# EAGLE board sr99-revA (EAGLE 9.6.2), part 1 of 6
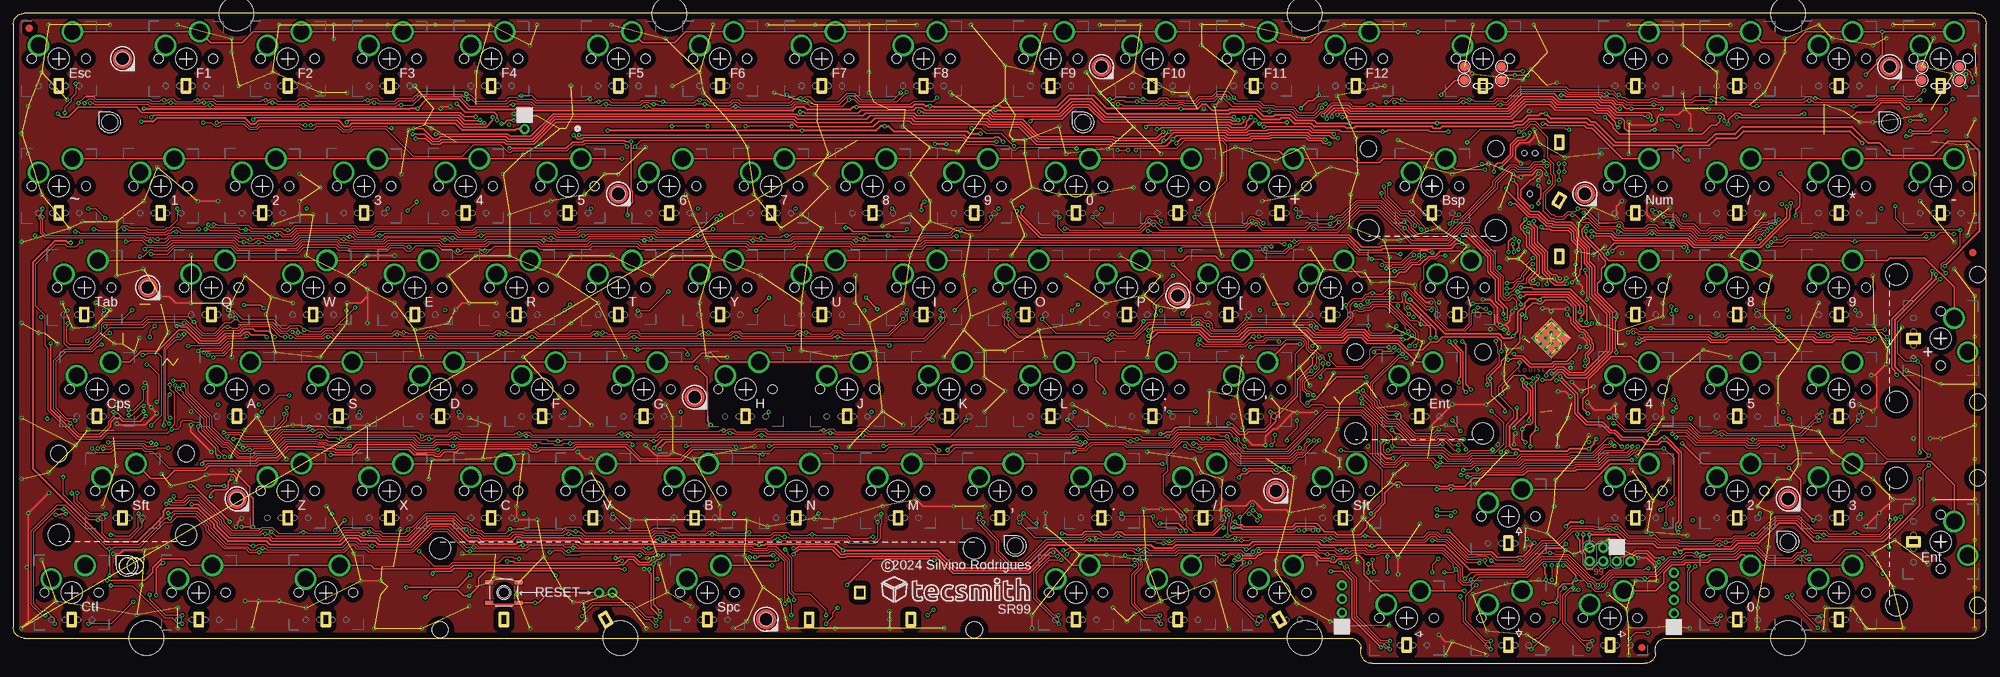
[diagram p0: board, top side]
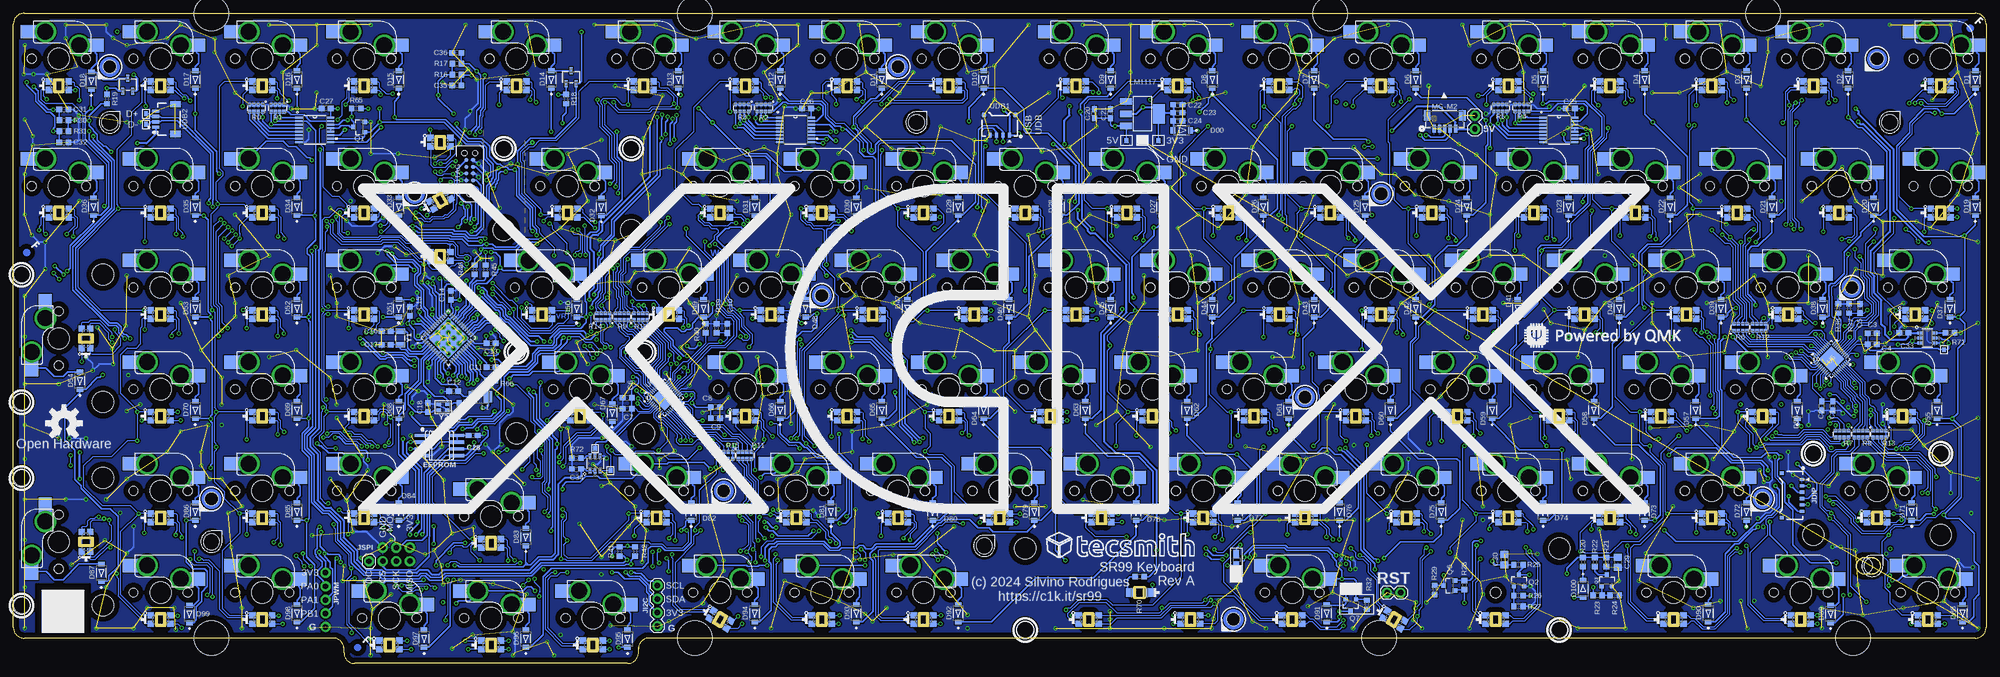
[diagram p1: board, bottom side, seen from below]

Size 369.48 x 121.83 mm. Coordinates in mm from the lower left corner, seen from the top.
Outline: 252.41,2.76 252.41,2 arc90 254.41,0 305.56,0 arc90 307.56,2 307.56,2.76
Outline: 252.41,2.76 252.41,3
Outline: 307.56,2.76 307.56,3
Outline: 307.56,2.76 arc-90 309.56,4.76 367.48,4.76 arc90 369.48,6.76 369.48,119.83 arc90 367.48,121.83 2,121.83 arc90 0,119.83 0,6.76 arc90 2,4.76 250.41,4.76 arc-90 252.41,2.76
Outline: 22.81,16.79 21.31,16.79 arc-180 21.31,19.79 22.81,19.79 arc-180 22.81,16.79
Copper layers (1*16): Top 0.035mm / dielectric 1.5mm / Bottom 0.035mm
Design rules "default *": minimum track width 6mil, minimum drill 0.35mm, track to track 9.5mil, track to pad 9.5mil, pad to pad 9.5mil, via to via 9.5mil, smd to smd 9.5mil, copper to edge 40mil, drill to drill 4mil, minimum pad ring 10mil, minimum via ring 8mil, stop-mask expansion 4mil, vias tented up to drill 0mil, thermal gap 9.5mil
Holes 6.5 mm at 332.38,121.8 241.89,121.8 122.83,121.8 41.83,121.8 332.38,4.79 241.89,4.79 113.72,4.79 24.97,4.79
Holes 2 mm at 91.87,13.29
Holes 3 mm at 22.81,18.29

## Footprints (pad centres in the part's own frame; a part is rotated, then mirrored left to right if it is on the bottom)
1X02 = drill 1.016 pad 1.88: 1 0,0; 2 2.54,0
C0603 = smd 1.1 x 1: 1 -0.85,0; 2 0.85,0
0603 = smd 1.1 x 1: 1 -0.85,0; 2 0.85,0
C0805 = smd 1.3 x 1.5: 1 -0.95,0; 2 0.95,0
SOD-123 = smd 0.914 x 1.219: A 1.638,0; C -1.638,0
LED-RM-MILL = smd 1.5 x 1.6: A 1.8,0; C -1.8,0
8-SOIC-SO8_N_W_DUAL = smd 0.6 x 2.731: 1 -1.905,-3.29; 2 -0.635,-3.29; 3 0.635,-3.29; 4 1.905,-3.29; 5 1.905,3.29; 6 0.635,3.29; 7 -0.635,3.29; 8 -1.905,3.29
MGEEK-M2-HOLE = hole 3: 0,0
BRUTAL-1800-HOLE = hole 2.5: 0,0
MX-STABS-200U = hole 3.988: -11.938,8.255; 11.938,8.255 | hole 3.048: -11.938,-6.985; 11.938,-6.985
MX-STABS-625U = hole 3.988: -50,8.255; 50,8.255 | hole 3.048: -50,-6.985; 50,-6.985
MOLEX_781710006 = smd 0.6 x 0.85: 1 -3,2; 2 -1.8,2; 3 -0.6,2; 4 0.6,2; 5 1.8,2; 6 3,2 | smd 0.7 x 0.8: NC1 -4.15,-1.775; NC2 4.15,-1.775
1X04 = drill 1.016 pad 1.88: 1 0,0; 2 2.54,0; 3 5.08,0; 4 7.62,0
1X05_NO_SILK = drill 1.016 pad 1.88: 1 0,0; 2 2.54,0; 3 5.08,0; 4 7.62,0; 5 10.16,0
2X3-NS = drill 1.016 pad 1.88: 1 -2.54,-1.27; 2 -2.54,1.27; 3 0,-1.27; 4 0,1.27; 5 2.54,-1.27; 6 2.54,1.27
1X01 = drill 1.016 pad 1.88: 1 0,0
TC2050-IDC-NL = smd 0.787 x 0.787: 1 1.27,-0.635; 2 2.54,-0.635; 3 3.81,-0.635; 4 5.08,-0.635; 5 6.35,-0.635; 6 6.35,0.635; 7 5.08,0.635; 8 3.81,0.635; 9 2.54,0.635; 10 1.27,0.635 | hole 1: 0,0; 7.62,-1.016; 7.62,1.016
L3225M = smd 1.6 x 2.2: 1 -1.4,0; 2 1.4,0
SOT223 = smd 1.219 x 2.235: 1 -2.311,-3.099; 2 0,-3.099; 3 2.311,-3.099 | smd 3.6 x 2.2: 4 0,3.099
CONN5_SM05B-SRSS_JST = smd 0.66 x 1.549: 1 -2,-1.772; 2 -1,-1.772; 3 0,-1.772; 4 1,-1.772; 5 2,-1.772 | smd 1.295 x 1.905: 6 -3.3,0.698; 7 3.3,0.698
SOT23-3 = smd 0.8 x 0.9: 1 -0.95,-1; 2 0.95,-1; 3 0,1.1
SOT-23-3L_AOS = smd 0.559 x 1.321: 1 -0.953,-1.194; 2 0.953,-1.194; 3 0,1.194
R0603X4 = smd 0.7 x 0.6: 1 -0.65,1.2; 2 -0.65,0.4; 3 -0.65,-0.4; 4 -0.65,-1.2; 5 0.65,-1.2; 6 0.65,-0.4; 7 0.65,0.4; 8 0.65,1.2
R0603 = smd 1 x 1.1: 1 -0.85,0; 2 0.85,0
R0805W = smd 1.5 x 1: 1 -1.052,0; 2 1.052,0
TACTILE_SWITCH_SMD_5.2MM = smd 1.524 x 0.762: 1 -2.794,1.905; 2 2.794,1.905; 3 -2.794,-1.905; 4 2.794,-1.905
MX-5-PIN-HOTSWAP-PAD = smd 3.15 x 2.5 bottom: 1@1 -6.785,2.54; 2@1 5.542,5.08 | drill 3 pad 3.75: 1@2 -3.81,2.54; 2@2 2.54,5.08 | hole 3.988: 0,0 | hole 1.7: -5.08,0; 5.08,0
MX-5-PIN-SKYLOONG-KNOB = smd 3.15 x 2.5 bottom: 1@1 -6.785,2.54; 2@1 5.542,5.08 | drill 3 pad 3.75: 1@2 -3.81,2.54; 2@2 2.54,5.08 | smd 1.75 x 1.75: A 3.5,-4; B 3.5,-1.5; C -3.5,-1.5; S -3.5,-4 | hole 3.988: 0,0 | hole 1.7: -5.08,0; 5.08,0
PAD.03X.03-SQ = smd 0.762 x 0.762: 1 0,0
UFQFPN-48_7X7X0P55MM-THERM = smd 0.813 x 0.305: 1 -3.454,2.75; 2 -3.454,2.25; 3 -3.454,1.75; 4 -3.454,1.25; 5 -3.454,0.75; 6 -3.454,0.25; 7 -3.454,-0.25; 8 -3.454,-0.75; 9 -3.454,-1.25; 10 -3.454,-1.75; 11 -3.454,-2.25; 12 -3.454,-2.75; 25 3.454,-2.75; 26 3.454,-2.25; 27 3.454,-1.75; 28 3.454,-1.25; 29 3.454,-0.75; 30 3.454,-0.25; 31 3.454,0.25; 32 3.454,0.75; 33 3.454,1.25; 34 3.454,1.75; 35 3.454,2.25; 36 3.454,2.75 | smd 0.305 x 0.813: 13 -2.75,-3.454; 14 -2.25,-3.454; 15 -1.75,-3.454; 16 -1.25,-3.454; 17 -0.75,-3.454; 18 -0.25,-3.454; 19 0.25,-3.454; 20 0.75,-3.454; 21 1.25,-3.454; 22 1.75,-3.454; 23 2.25,-3.454; 24 2.75,-3.454; 37 2.75,3.454; 38 2.25,3.454; 39 1.75,3.454; 40 1.25,3.454; 41 0.75,3.454; 42 0.25,3.454; 43 -0.25,3.454; 44 -0.75,3.454; 45 -1.25,3.454; 46 -1.75,3.454; 47 -2.25,3.454; 48 -2.75,3.454 | smd 5 x 5.4: 49 0.2,0 | smd 0.4 x 5: 49@1 -2.5,-0.2 | smd 0.56 x 0.29 rotated 45: 49@2 -2.4,2.4 | smd 5.4 x 5.4 bottom: 49@3 0,0 | drill 0.4: 49@4 -0.711,2.134; 49@5 0.711,2.134; 49@6 2.134,2.134; 49@7 -2.134,0.711; 49@8 -0.711,0.711; 49@9 0.711,0.711; 49@10 2.134,0.711; 49@11 -2.134,-0.711; 49@12 -0.711,-0.711; 49@13 0.711,-0.711; 49@14 2.134,-0.711; 49@15 -2.134,-2.134; 49@16 -0.711,-2.134; 49@17 0.711,-2.134; 49@18 2.134,-2.134
TSSOP16 = smd 1.408 x 0.356: 1 -2.952,2.275; 2 -2.952,1.625; 3 -2.952,0.975; 4 -2.952,0.325; 5 -2.952,-0.325; 6 -2.952,-0.975; 7 -2.952,-1.625; 8 -2.952,-2.275; 9 2.952,-2.275; 10 2.952,-1.625; 11 2.952,-0.975; 12 2.952,-0.325; 13 2.952,0.325; 14 2.952,0.975; 15 2.952,1.625; 16 2.952,2.275
UQFN40 = smd 0.813 x 0.203: 1 -2.4,1.8; 2 -2.4,1.4; 3 -2.4,1; 4 -2.4,0.6; 5 -2.4,0.2; 6 -2.4,-0.2; 7 -2.4,-0.6; 8 -2.4,-1; 9 -2.4,-1.4; 10 -2.4,-1.8; 21 2.4,-1.8; 22 2.4,-1.4; 23 2.4,-1; 24 2.4,-0.6; 25 2.4,-0.2; 26 2.4,0.2; 27 2.4,0.6; 28 2.4,1; 29 2.4,1.4; 30 2.4,1.8 | smd 0.203 x 0.813: 11 -1.8,-2.4; 12 -1.4,-2.4; 13 -1,-2.4; 14 -0.6,-2.4; 15 -0.2,-2.4; 16 0.2,-2.4; 17 0.6,-2.4; 18 1,-2.4; 19 1.4,-2.4; 20 1.8,-2.4; 31 1.8,2.4; 32 1.4,2.4; 33 1,2.4; 34 0.6,2.4; 35 0.2,2.4; 36 -0.2,2.4; 37 -0.6,2.4; 38 -1,2.4; 39 -1.4,2.4; 40 -1.8,2.4 | smd 3 x 3.4: EPAD 0.225,0 | smd 0.566 x 0.566 rotated 315: EPAD@1 -1.278,1.299 | smd 0.4 x 3: EPAD@2 -1.477,-0.2
SOT-23-THIN-6_DDC_TEX = smd 1.003 x 0.559: 1 -1.378,0.95; 2 -1.378,0; 3 -1.378,-0.95; 4 1.378,-0.95; 5 1.378,0; 6 1.378,0.95
MOLEX_781710004 = smd 0.6 x 0.85: 1 -1.8,2; 2 -0.6,2; 3 0.6,2; 4 1.8,2 | smd 0.7 x 0.8: NC1 -2.95,-1.775; NC2 2.95,-1.775
JST_SM04B-SRSS-TB_LF_SN = smd 0.6 x 1.35: 1 -1.5,0; 2 -0.5,0; 3 0.5,0; 4 1.5,0 | smd 1.2 x 2: NC1 2.8,-3.675; NC2 -2.8,-3.675
CRYSTAL-SMD-3.2X1.5MM = smd 1 x 1.8: P$1 -1.25,0; P$2 1.25,0
CRYSTAL_2.5X2 = smd 0.9 x 0.75: 1 -0.825,-0.625; 2 0.825,-0.625; 3 0.825,0.625; 4 -0.825,0.625
156120M173000-MILL = smd 1.2 x 1.2: 1 -1.85,0.8; 2 -1.85,-0.8; 3 1.85,-0.8; 4 1.85,0.8

## Placement (x,y rotation side)
5V  [1X02]  95.75,100.15 90 bottom
C1  1uF  [C0603]  28.73,48.25 90 bottom
C2  0.1uF  [C0603]  30.77,48.25 90 bottom
C3  1uF  [C0603]  21.3,61.9 180 bottom
C4  0.1uF  [C0603]  21.3,59.83 180 bottom
C5  0.1uF  [C0603]  23.65,66.53 270 bottom
C6  1uF  [C0603]  254.5,49.8 0 bottom
C7  0.1uF  [C0603]  254.5,47.77 0 bottom
C8  1uF  [C0603]  238,48 180 bottom
C9  0.1uF  [C0603]  238,45.98 180 bottom
C10  0.1uF  [C0603]  235.78,62.8 270 bottom
C11  22uF  [C0603]  280,55.5 0 bottom
C12  100nF  [C0603]  287,51 180 bottom
C13  100nF  [C0603]  280,60 0 bottom
C14  100nF  [C0603]  287.5,69 90 bottom
C15  100nF  [C0603]  295.23,66 90 bottom
C16  4.3pF  [C0603]  299.65,62.25 180 bottom
C17  4.3pF  [C0603]  299.65,59.75 180 bottom
C18  12pF  [C0603]  291.85,48 90 bottom
C19  12pF  [C0603]  286,48 270 bottom
C20  22uF  [0603]  167,103 90 bottom
C21  100nF  [0603]  164,103 90 bottom
C22  100nF  [0603]  151.4,104.7 0 bottom
C23  22uF  [0603]  151.4,103.2 0 bottom
C24  4.7uF  [0603]  151.4,101.7 0 bottom
C25  100nF  [0603]  77.9,104 180 bottom
C26  100nF  [0603]  220.9,104 180 bottom
C27  100nF  [0603]  310.9,104 180 bottom
C28  100nF  [0603]  283.35,42.75 0 bottom
C29  10uF  [C0805]  68.95,18.95 270 bottom
C30  100nF  [C0805]  90.2,19.48 270 bottom
C31  100nF  [C0603]  360,103.8 0 bottom
C32  100nF  [C0603]  360,97.67 0 bottom
C33  1uF  [C0603]  15.42,61.95 0 bottom
C34  1uF  [C0603]  264.02,36.45 0 bottom
C35  100nF  [C0603]  286.43,108.3 180 bottom
C36  100nF  [C0603]  286.43,114.42 180 bottom
D00  B5819W SL  [SOD-123]  150.65,99.9 180 bottom
D1  [SOD-123]  2.03,109.43 90 bottom
D2  [SOD-123]  25.84,109.43 90 bottom
D3  [SOD-123]  44.89,109.43 90 bottom
D4  [SOD-123]  63.94,109.43 90 bottom
D5  [SOD-123]  82.99,109.43 90 bottom
D6  [SOD-123]  106.81,109.43 90 bottom
D7  [SOD-123]  125.86,109.43 90 bottom
D8  [SOD-123]  144.91,109.43 90 bottom
D9  [SOD-123]  163.96,109.43 90 bottom
D10  [SOD-123]  187.77,109.43 90 bottom
D11  [SOD-123]  206.82,109.43 90 bottom
D12  [SOD-123]  225.87,109.43 90 bottom
D13  [SOD-123]  244.92,109.43 90 bottom
D14  [SOD-123]  268.73,109.43 90 bottom
D15  [SOD-123]  297.31,109.43 90 bottom
D16  [SOD-123]  316.36,109.43 90 bottom
D17  [SOD-123]  335.41,109.43 90 bottom
D18  [SOD-123]  354.88,109.2 90 bottom
D19  [SOD-123]  2.03,85.61 90 bottom
D20  [SOD-123]  21.08,85.61 90 bottom
D21  [SOD-123]  40.13,85.61 90 bottom
D22  [SOD-123]  59.18,85.61 90 bottom
D23  [SOD-123]  78.23,85.61 90 bottom
D24  [SOD-123]  97.28,85.61 90 bottom
D25  [SOD-123]  116.33,85.61 90 bottom
D26  [SOD-123]  135.38,85.61 90 bottom
D27  [SOD-123]  154.43,85.61 90 bottom
D28  [SOD-123]  173.48,85.61 90 bottom
D29  [SOD-123]  192.53,85.61 90 bottom
D30  [SOD-123]  211.58,85.61 90 bottom
D31  [SOD-123]  230.63,85.61 90 bottom
D32  [SOD-123]  259.36,85.54 90 bottom
D33  [SOD-123]  297.31,85.61 90 bottom
D34  [SOD-123]  316.36,85.61 90 bottom
D35  [SOD-123]  335.41,85.61 90 bottom
D36  [SOD-123]  354.46,85.61 90 bottom
D37  [SOD-123]  6.79,66.56 90 bottom
D38  [SOD-123]  30.61,66.56 90 bottom
D39  [SOD-123]  49.66,66.56 90 bottom
D40  [SOD-123]  68.71,66.56 90 bottom
D41  [SOD-123]  87.76,66.56 90 bottom
D42  [SOD-123]  106.81,66.56 90 bottom
D43  [SOD-123]  125.86,66.56 90 bottom
D44  [SOD-123]  144.91,66.56 90 bottom
D45  [SOD-123]  163.96,66.56 90 bottom
D46  [SOD-123]  183.01,66.56 90 bottom
D47  [SOD-123]  202.06,66.56 90 bottom
D48  [SOD-123]  221.11,66.56 90 bottom
D49  [SOD-123]  240.21,66.56 90 bottom
D50  [SOD-123]  263.97,66.56 90 bottom
D51  [SOD-123]  297.31,66.56 90 bottom
D52  [SOD-123]  316.36,66.56 90 bottom
D53  [SOD-123]  335.41,66.56 90 bottom
D54  [SOD-123]  357,53 90 bottom
D55  [SOD-123]  9.18,47.52 90 bottom
D56  [SOD-123]  35.37,47.52 90 bottom
D57  [SOD-123]  54.42,47.52 90 bottom
D58  [SOD-123]  73.47,47.52 90 bottom
D59  [SOD-123]  92.52,47.52 90 bottom
D60  [SOD-123]  111.57,47.52 90 bottom
D61  [SOD-123]  130.62,47.52 90 bottom
D62  [SOD-123]  149.67,47.52 90 bottom
D63  [SOD-123]  168.72,47.52 90 bottom
D64  [SOD-123]  187.77,47.52 90 bottom
D65  [SOD-123]  206.82,47.52 90 bottom
D66  [SOD-123]  225.87,47.52 90 bottom
D67  [SOD-123]  257.32,47.02 90 bottom
D68  [SOD-123]  297.31,47.52 90 bottom
D69  [SOD-123]  316.36,47.52 90 bottom
D70  [SOD-123]  335.41,47.52 90 bottom
D71  [SOD-123]  13.94,28.46 90 bottom
D72  [SOD-123]  44.89,28.46 90 bottom
D73  [SOD-123]  63.94,28.46 90 bottom
D74  [SOD-123]  82.99,28.46 90 bottom
D75  [SOD-123]  102.04,28.46 90 bottom
D76  [SOD-123]  121.09,28.46 90 bottom
D77  [SOD-123]  140.14,28.46 90 bottom
D78  [SOD-123]  159.19,28.46 90 bottom
D79  [SOD-123]  178.24,28.46 90 bottom
D80  [SOD-123]  197.29,28.46 90 bottom
D81  [SOD-123]  216.34,28.46 90 bottom
D82  [SOD-123]  242.54,28.46 90 bottom
D83  [SOD-123]  273.49,23.7 90 bottom
D84  [SOD-123]  297.31,28.46 90 bottom
D85  [SOD-123]  316.36,28.46 90 bottom
D86  [SOD-123]  335.41,28.46 90 bottom
D87  [SOD-123]  353,17 90 bottom
D88  [SOD-123]  4.41,9.41 90 bottom
D89  [SOD-123]  29.12,9.29 90 bottom
D90  [SOD-123]  52.04,9.41 90 bottom
D91  [SOD-123]  123.47,9.41 90 bottom
D92  [SOD-123]  192.53,9.41 90 bottom
D93  [SOD-123]  211.58,9.41 90 bottom
D94  [SOD-123]  230.63,9.41 90 bottom
D95  [SOD-123]  254.44,4.65 90 bottom
D96  [SOD-123]  273.49,4.65 90 bottom
D97  [SOD-123]  292.54,4.65 90 bottom
D98  [SOD-123]  316.36,9.41 90 bottom
D99  [SOD-123]  336.51,9.29 90 bottom
D100  1N4148  [SOD-123]  75.5,14 270 bottom
D107  BLUE  [LED-RM-MILL]  158.54,13.29 180 bottom
EEPROM  M25CDUAL  [8-SOIC-SO8_N_W_DUAL]  289.69,40.85 270 bottom
G1  MGEEK-M2-HOLE  [MGEEK-M2-HOLE]  18.05,101.39 0 top
G2  MGEEK-M2-HOLE  [MGEEK-M2-HOLE]  200.34,101.39 0 top
G3  MGEEK-M2-HOLE  [MGEEK-M2-HOLE]  351.43,101.39 0 top
G4  MGEEK-M2-HOLE  [MGEEK-M2-HOLE]  332.38,22.81 0 top
G5  MGEEK-M2-HOLE  [MGEEK-M2-HOLE]  187.65,22.05 0 top
G6  MGEEK-M2-HOLE  [MGEEK-M2-HOLE]  21.31,18.29 0 top
H1  BRURAL-1800-HOLE  [BRUTAL-1800-HOLE]  351.43,111.8 0 top
H2  BRURAL-1800-HOLE  [BRUTAL-1800-HOLE]  203.79,111.8 0 top
H3  BRURAL-1800-HOLE  [BRUTAL-1800-HOLE]  20.43,113.3 0 top
H4  BRURAL-1800-HOLE  [BRUTAL-1800-HOLE]  294.3,87.99 0 top
H5  BRURAL-1800-HOLE  [BRUTAL-1800-HOLE]  113.3,87.99 0 top
H6  BRURAL-1800-HOLE  [BRUTAL-1800-HOLE]  218.07,68.94 0 top
H7  BRURAL-1800-HOLE  [BRUTAL-1800-HOLE]  25.19,70.44 0 top
H8  BRURAL-1800-HOLE  [BRUTAL-1800-HOLE]  127.59,49.89 0 top
H9  BRURAL-1800-HOLE  [BRUTAL-1800-HOLE]  332.38,30.84 0 top
H10  BRURAL-1800-HOLE  [BRUTAL-1800-HOLE]  236.43,32.34 0 top
H11  BRURAL-1800-HOLE  [BRUTAL-1800-HOLE]  140.97,8.29 0 top
H12  BRURAL-1800-HOLE  [BRUTAL-1800-HOLE]  41.89,30.84 0 top
H_BSP  MX-STABS-200U  [MX-STABS-200U]  265.7,89.49 180 top
H_ENT  MX-STABS-200U  [MX-STABS-200U]  263.32,51.39 180 top
H_LS  MX-STABS-200U  [MX-STABS-200U]  20.43,32.34 180 top
H_NEN  MX-STABS-200U  [MX-STABS-200U]  360.95,22.81 90 top
H_NP  MX-STABS-200U  [MX-STABS-200U]  360.95,60.91 90 top
H_SPC  MX-STABS-625U  [MX-STABS-625U]  129.97,13.29 0 top
JDIP  MOLEX_0781710006  [MOLEX_781710006]  36.5,31.5 270 bottom
JI2C  [1X04]  248.84,14.62 270 bottom
JPWM  [1X05_NO_SILK]  311,17 270 top
JSPI  DNP  [2X3-NS]  297.75,20.45 0 top
JSPI@2  [1X01]  302.85,19.15 270 bottom
JTAG  TC2050IDC-NL  [TC2050-IDC-NL]  284,88 90 bottom
L1  10uH ±10%  [L3225M]  282,50 0 bottom
LM1117  AMS1117-3.3  [SOT223]  158,103 270 bottom
LOGO1  OSHW-LOGOL  [OSHW-LOGO-L]  360,45 0 bottom
M_M2  SM05B-SRSS-TB(LF)(SN)  [CONN5_SM05B-SRSS_JST]  101.39,102 0 bottom
Q1  2N7002  [SOT23-3]  304.68,100.53 90 bottom
Q2  2N7002  [SOT23-3]  87.5,15.5 0 bottom
Q3  2N7002  [SOT23-3]  71.05,15.5 0 bottom
Q4  AO3401A  [SOT-23-3L_AOS]  265,109.85 0 bottom
Q5  AO3401A  [SOT-23-3L_AOS]  348.05,108.47 0 bottom
Q6  BSH201  [SOT23-3]  100.5,14.6 90 bottom
Q7  2N7002  [SOT23-3]  119,11 180 bottom
R0  10K  [R0603X4]  324,104.05 270 bottom
R1  10K  [R0603X4]  320,104.05 270 bottom
R2  10K  [R0603X4]  229,104.1 270 bottom
R3  10K  [R0603X4]  233,104.1 270 bottom
R4  10K  [R0603X4]  87,104.1 270 bottom
R5  10K  [R0603X4]  91,104.1 270 bottom
R6  20R  [R0603X4]  46,63 90 bottom
R7  20R  [R0603X4]  27,43 270 bottom
R8  20R  [R0603X4]  23.5,43 270 bottom
R9  20R  [R0603X4]  255.5,65 90 bottom
R10  20R  [R0603X4]  252,65 90 bottom
R11  20R  [R0603X4]  232.5,39 270 bottom
R12  51R  [R0603X4]  42.5,63 90 bottom
R13  51R  [R0603X4]  20,43 270 bottom
R14  51R  [R0603X4]  259,65 90 bottom
R15  51R  [R0603X4]  236,39 270 bottom
R16  5.1K  [R0603]  286.43,110.35 180 bottom
R17  5.1K  [R0603]  286.43,112.4 180 bottom
R18  10K  [R0603]  265.95,105.75 270 bottom
R19  10K  [R0603]  351.95,105.75 270 bottom
R20  330K  [R0603]  75.5,19 270 bottom
R21  1M  [R0603]  71.1,19 90 bottom
R22  10K  [R0603]  73.3,19 90 bottom
R23  10K  [R0603]  72.75,12.75 180 bottom
R24  100K  [R0603]  69.55,12.75 0 bottom
R25  100R  [R0603]  87.6,18.5 180 bottom
R26  1K  [R0603]  87.6,12.72 0 bottom
R27  10K  [R0603]  87.6,10.7 0 bottom
R28  100K  [R0603]  97.7,14.7 270 bottom
R29  100K  [R0603]  103.3,13.8 90 bottom
R30  5.1K  [R0603]  360,101.78 0 bottom
R31  5.1K  [R0603]  360,99.72 0 bottom
R32  10K  [R0603]  116,11 270 bottom
R33@1  0R  [R0805W]  140.43,19.45 270 bottom
R33@2  0R-DNP  [R0805W]  140.43,17.35 270 bottom
R34  0R-DNP  [R0805W]  119,14.03 180 bottom
R37  100K  [R0603]  25.68,66.53 270 bottom
R38  10K  [R0603]  27.73,66.53 270 bottom
R39  100K  [R0603]  237.8,62.8 270 bottom
R40  10K  [R0603]  239.82,62.8 270 bottom
R41  4K7  [R0603]  255.93,21 90 bottom
R42  4K7  [R0603]  253,21 90 bottom
R45  10R  [R0603]  281.02,73.8 270 bottom
R46  10R  [R0603]  283.05,73.8 270 bottom
R65  5.1K  [R0603]  305.25,104 0 bottom
R66  10K  [R0603]  280,53 180 bottom
R70  1K  [R0603]  158.54,16.29 180 bottom
R71  1K  [R0603]  6.75,61.97 180 bottom
R72  1K  [R0603]  264.02,38.48 0 bottom
RST  [1X02]  112.21,13.29 0 bottom
S1  Reset  [TACTILE_SWITCH_SMD_5.2MM]  91.87,13.29 0 top
SW_0  MX-5-PIN-HOTSWAP-PAD  [MX-5-PIN-HOTSWAP-PAD]  199.03,89.49 0 top
SW_1  MX-5-PIN-HOTSWAP-PAD  [MX-5-PIN-HOTSWAP-PAD]  27.57,89.49 0 top
SW_2  MX-5-PIN-HOTSWAP-PAD  [MX-5-PIN-HOTSWAP-PAD]  46.62,89.49 0 top
SW_3  MX-5-PIN-HOTSWAP-PAD  [MX-5-PIN-HOTSWAP-PAD]  65.67,89.49 0 top
SW_4  MX-5-PIN-HOTSWAP-PAD  [MX-5-PIN-HOTSWAP-PAD]  84.72,89.49 0 top
SW_5  MX-5-PIN-HOTSWAP-PAD  [MX-5-PIN-HOTSWAP-PAD]  103.78,89.49 0 top
SW_6  MX-5-PIN-HOTSWAP-PAD  [MX-5-PIN-HOTSWAP-PAD]  122.83,89.49 0 top
SW_7  MX-5-PIN-HOTSWAP-PAD  [MX-5-PIN-HOTSWAP-PAD]  141.88,89.49 0 top
SW_8  MX-5-PIN-HOTSWAP-PAD  [MX-5-PIN-HOTSWAP-PAD]  160.93,89.49 0 top
SW_9  MX-5-PIN-HOTSWAP-PAD  [MX-5-PIN-HOTSWAP-PAD]  179.97,89.49 0 top
SW_A  MX-5-PIN-HOTSWAP-PAD  [MX-5-PIN-HOTSWAP-PAD]  41.86,51.39 0 top
SW_B  MX-5-PIN-HOTSWAP-PAD  [MX-5-PIN-HOTSWAP-PAD]  127.59,32.34 0 top
SW_BSP  MX-5-PIN-HOTSWAP-PAD  [MX-5-PIN-HOTSWAP-PAD]  265.7,89.49 0 top
SW_C  MX-5-PIN-HOTSWAP-PAD  [MX-5-PIN-HOTSWAP-PAD]  89.49,32.34 0 top
SW_CB  MX-5-PIN-HOTSWAP-PAD  [MX-5-PIN-HOTSWAP-PAD]  246.65,70.44 0 top
SW_CL  MX-5-PIN-HOTSWAP-PAD  [MX-5-PIN-HOTSWAP-PAD]  15.67,51.39 0 top
SW_CM  MX-5-PIN-HOTSWAP-PAD  [MX-5-PIN-HOTSWAP-PAD]  184.74,32.34 0 top
SW_CS  MX-5-PIN-HOTSWAP-PAD  [MX-5-PIN-HOTSWAP-PAD]  213.31,51.39 0 top
SW_D  MX-5-PIN-HOTSWAP-PAD  [MX-5-PIN-HOTSWAP-PAD]  79.96,51.39 0 top
SW_DN  MX-5-PIN-HOTSWAP-PAD  [MX-5-PIN-HOTSWAP-PAD]  279.99,8.53 0 top
SW_DP  MX-5-PIN-HOTSWAP-PAD  [MX-5-PIN-HOTSWAP-PAD]  270.46,70.44 0 top
SW_DSH  MX-5-PIN-HOTSWAP-PAD  [MX-5-PIN-HOTSWAP-PAD]  322.85,89.49 0 top
SW_DT  MX-5-PIN-HOTSWAP-PAD  [MX-5-PIN-HOTSWAP-PAD]  203.79,32.34 0 top
SW_E  MX-5-PIN-HOTSWAP-PAD  [MX-5-PIN-HOTSWAP-PAD]  75.2,70.44 0 top
SW_ENT  MX-5-PIN-HOTSWAP-PAD  [MX-5-PIN-HOTSWAP-PAD]  263.32,51.39 0 top
SW_EP  MX-5-PIN-HOTSWAP-PAD  [MX-5-PIN-HOTSWAP-PAD]  237.12,89.49 0 top
SW_ESC  MX-5-PIN-HOTSWAP-PAD  [MX-5-PIN-HOTSWAP-PAD]  8.53,113.3 0 top
SW_F  MX-5-PIN-HOTSWAP-PAD  [MX-5-PIN-HOTSWAP-PAD]  99.01,51.39 0 top
SW_F1  MX-5-PIN-HOTSWAP-PAD  [MX-5-PIN-HOTSWAP-PAD]  32.34,113.3 0 top
SW_F2  MX-5-PIN-HOTSWAP-PAD  [MX-5-PIN-HOTSWAP-PAD]  51.39,113.3 0 top
SW_F3  MX-5-PIN-HOTSWAP-PAD  [MX-5-PIN-HOTSWAP-PAD]  70.44,113.3 0 top
SW_F4  MX-5-PIN-HOTSWAP-PAD  [MX-5-PIN-HOTSWAP-PAD]  89.49,113.3 0 top
SW_F5  MX-5-PIN-HOTSWAP-PAD  [MX-5-PIN-HOTSWAP-PAD]  113.3,113.3 0 top
SW_F6  MX-5-PIN-HOTSWAP-PAD  [MX-5-PIN-HOTSWAP-PAD]  132.35,113.3 0 top
SW_F7  MX-5-PIN-HOTSWAP-PAD  [MX-5-PIN-HOTSWAP-PAD]  151.4,113.3 0 top
SW_F8  MX-5-PIN-HOTSWAP-PAD  [MX-5-PIN-HOTSWAP-PAD]  170.45,113.3 0 top
SW_F9  MX-5-PIN-HOTSWAP-PAD  [MX-5-PIN-HOTSWAP-PAD]  194.26,113.3 0 top
SW_F10  MX-5-PIN-HOTSWAP-PAD  [MX-5-PIN-HOTSWAP-PAD]  213.31,113.3 0 top
SW_F11  MX-5-PIN-HOTSWAP-PAD  [MX-5-PIN-HOTSWAP-PAD]  232.36,113.3 0 top
SW_F12  MX-5-PIN-HOTSWAP-PAD  [MX-5-PIN-HOTSWAP-PAD]  251.41,113.3 0 top
SW_F13  MX-5-PIN-SKYLOONG-KNOB  [MX-5-PIN-SKYLOONG-KNOB]  275.23,113.3 0 top
SW_F14  MX-5-PIN-HOTSWAP-PAD  [MX-5-PIN-HOTSWAP-PAD]  303.8,113.3 0 top
SW_F15  MX-5-PIN-HOTSWAP-PAD  [MX-5-PIN-HOTSWAP-PAD]  322.85,113.3 0 top
SW_F16  MX-5-PIN-HOTSWAP-PAD  [MX-5-PIN-HOTSWAP-PAD]  341.9,113.3 0 top
SW_F17  MX-5-PIN-SKYLOONG-KNOB  [MX-5-PIN-SKYLOONG-KNOB]  360.95,113.3 0 top
SW_FS  MX-5-PIN-HOTSWAP-PAD  [MX-5-PIN-HOTSWAP-PAD]  222.84,32.34 0 top
SW_G  MX-5-PIN-HOTSWAP-PAD  [MX-5-PIN-HOTSWAP-PAD]  118.06,51.39 0 top
SW_H  MX-5-PIN-HOTSWAP-PAD  [MX-5-PIN-HOTSWAP-PAD]  137.11,51.39 0 top
SW_I  MX-5-PIN-HOTSWAP-PAD  [MX-5-PIN-HOTSWAP-PAD]  170.45,70.44 0 top
SW_J  MX-5-PIN-HOTSWAP-PAD  [MX-5-PIN-HOTSWAP-PAD]  156.16,51.39 0 top
SW_K  MX-5-PIN-HOTSWAP-PAD  [MX-5-PIN-HOTSWAP-PAD]  175.21,51.39 0 top
SW_L  MX-5-PIN-HOTSWAP-PAD  [MX-5-PIN-HOTSWAP-PAD]  194.26,51.39 0 top
SW_LA  MX-5-PIN-HOTSWAP-PAD  [MX-5-PIN-HOTSWAP-PAD]  58.53,13.29 0 top
SW_LC  MX-5-PIN-HOTSWAP-PAD  [MX-5-PIN-HOTSWAP-PAD]  10.91,13.29 0 top
SW_LF  MX-5-PIN-HOTSWAP-PAD  [MX-5-PIN-HOTSWAP-PAD]  260.94,8.53 0 top
SW_LS  MX-5-PIN-HOTSWAP-PAD  [MX-5-PIN-HOTSWAP-PAD]  20.43,32.34 0 top
SW_LW  MX-5-PIN-HOTSWAP-PAD  [MX-5-PIN-HOTSWAP-PAD]  34.72,13.29 0 top
SW_M  MX-5-PIN-HOTSWAP-PAD  [MX-5-PIN-HOTSWAP-PAD]  165.69,32.34 0 top
SW_MIN  MX-5-PIN-HOTSWAP-PAD  [MX-5-PIN-HOTSWAP-PAD]  360.95,89.49 0 top
SW_MU  MX-5-PIN-HOTSWAP-PAD  [MX-5-PIN-HOTSWAP-PAD]  218.07,89.49 0 top
SW_MUL  MX-5-PIN-HOTSWAP-PAD  [MX-5-PIN-HOTSWAP-PAD]  341.9,89.49 0 top
SW_N  MX-5-PIN-HOTSWAP-PAD  [MX-5-PIN-HOTSWAP-PAD]  146.64,32.34 0 top
SW_N0  MX-5-PIN-HOTSWAP-PAD  [MX-5-PIN-HOTSWAP-PAD]  322.85,13.29 0 top
SW_N1  MX-5-PIN-HOTSWAP-PAD  [MX-5-PIN-HOTSWAP-PAD]  303.8,32.34 0 top
SW_N2  MX-5-PIN-HOTSWAP-PAD  [MX-5-PIN-HOTSWAP-PAD]  322.85,32.34 0 top
SW_N3  MX-5-PIN-HOTSWAP-PAD  [MX-5-PIN-HOTSWAP-PAD]  341.9,32.34 0 top
SW_N4  MX-5-PIN-HOTSWAP-PAD  [MX-5-PIN-HOTSWAP-PAD]  303.8,51.39 0 top
SW_N5  MX-5-PIN-HOTSWAP-PAD  [MX-5-PIN-HOTSWAP-PAD]  322.85,51.39 0 top
SW_N6  MX-5-PIN-HOTSWAP-PAD  [MX-5-PIN-HOTSWAP-PAD]  341.9,51.39 0 top
SW_N7  MX-5-PIN-HOTSWAP-PAD  [MX-5-PIN-HOTSWAP-PAD]  303.8,70.44 0 top
SW_N8  MX-5-PIN-HOTSWAP-PAD  [MX-5-PIN-HOTSWAP-PAD]  322.85,70.44 0 top
SW_N9  MX-5-PIN-HOTSWAP-PAD  [MX-5-PIN-HOTSWAP-PAD]  341.9,70.44 0 top
SW_ND  MX-5-PIN-HOTSWAP-PAD  [MX-5-PIN-HOTSWAP-PAD]  341.9,13.29 0 top
SW_NEN  MX-5-PIN-HOTSWAP-PAD  [MX-5-PIN-HOTSWAP-PAD]  360.95,22.81 270 top
SW_NP  MX-5-PIN-HOTSWAP-PAD  [MX-5-PIN-HOTSWAP-PAD]  360.95,60.91 270 top
SW_NUM  MX-5-PIN-HOTSWAP-PAD  [MX-5-PIN-HOTSWAP-PAD]  303.8,89.49 0 top
SW_O  MX-5-PIN-HOTSWAP-PAD  [MX-5-PIN-HOTSWAP-PAD]  189.5,70.44 0 top
SW_OB  MX-5-PIN-HOTSWAP-PAD  [MX-5-PIN-HOTSWAP-PAD]  227.6,70.44 0 top
SW_P  MX-5-PIN-HOTSWAP-PAD  [MX-5-PIN-HOTSWAP-PAD]  208.55,70.44 0 top
SW_Q  MX-5-PIN-HOTSWAP-PAD  [MX-5-PIN-HOTSWAP-PAD]  37.1,70.44 0 top
SW_QU  MX-5-PIN-HOTSWAP-PAD  [MX-5-PIN-HOTSWAP-PAD]  232.36,51.39 0 top
SW_R  MX-5-PIN-HOTSWAP-PAD  [MX-5-PIN-HOTSWAP-PAD]  94.25,70.44 0 top
SW_RA  MX-5-PIN-HOTSWAP-PAD  [MX-5-PIN-HOTSWAP-PAD]  199.03,13.29 0 top
SW_RC  MX-5-PIN-HOTSWAP-PAD  [MX-5-PIN-HOTSWAP-PAD]  237.12,13.29 0 top
SW_RS  MX-5-PIN-HOTSWAP-PAD  [MX-5-PIN-HOTSWAP-PAD]  249.03,32.34 0 top
SW_RT  MX-5-PIN-HOTSWAP-PAD  [MX-5-PIN-HOTSWAP-PAD]  299.04,8.53 0 top
SW_RW  MX-5-PIN-HOTSWAP-PAD  [MX-5-PIN-HOTSWAP-PAD]  218.07,13.29 0 top
SW_S  MX-5-PIN-HOTSWAP-PAD  [MX-5-PIN-HOTSWAP-PAD]  60.91,51.39 0 top
SW_SPC  MX-5-PIN-HOTSWAP-PAD  [MX-5-PIN-HOTSWAP-PAD]  129.97,13.29 0 top
SW_T  MX-5-PIN-HOTSWAP-PAD  [MX-5-PIN-HOTSWAP-PAD]  113.3,70.44 0 top
SW_TAB  MX-5-PIN-HOTSWAP-PAD  [MX-5-PIN-HOTSWAP-PAD]  13.29,70.44 0 top
SW_TDL  MX-5-PIN-HOTSWAP-PAD  [MX-5-PIN-HOTSWAP-PAD]  8.53,89.49 0 top
SW_U  MX-5-PIN-HOTSWAP-PAD  [MX-5-PIN-HOTSWAP-PAD]  151.4,70.44 0 top
SW_UP  MX-5-PIN-HOTSWAP-PAD  [MX-5-PIN-HOTSWAP-PAD]  279.99,27.57 0 top
SW_V  MX-5-PIN-HOTSWAP-PAD  [MX-5-PIN-HOTSWAP-PAD]  108.54,32.34 0 top
SW_W  MX-5-PIN-HOTSWAP-PAD  [MX-5-PIN-HOTSWAP-PAD]  56.15,70.44 0 top
SW_X  MX-5-PIN-HOTSWAP-PAD  [MX-5-PIN-HOTSWAP-PAD]  70.44,32.34 0 top
SW_Y  MX-5-PIN-HOTSWAP-PAD  [MX-5-PIN-HOTSWAP-PAD]  132.35,70.44 0 top
SW_Z  MX-5-PIN-HOTSWAP-PAD  [MX-5-PIN-HOTSWAP-PAD]  51.39,32.34 0 top
TP-3V3  TEST-POINT.3SQ  [PAD.03X.03-SQ]  155,98 0 bottom
TP-5V  TEST-POINT.3SQ  [PAD.03X.03-SQ]  161,98 0 bottom
TP-GND  TEST-POINT.3SQ  [PAD.03X.03-SQ]  158,98 0 bottom
TP-LED-EN  TEST-POINT.3SQ  [PAD.03X.03-SQ]  257.65,36.15 0 bottom
TP-USB+  TEST-POINT.3SQ  [PAD.03X.03-SQ]  344.65,103 0 bottom
TP-USB-  TEST-POINT.3SQ  [PAD.03X.03-SQ]  344.65,101.05 0 bottom
TP-V-LED-1  TEST-POINT.3SQ  [PAD.03X.03-SQ]  7.9,58.8 0 bottom
TP-V-LED-2  TEST-POINT.3SQ  [PAD.03X.03-SQ]  260.5,40.3 0 bottom
U1  STM32F411CEU7THERM  [UFQFPN-48_7X7X0P55MM-THERM]  288,61 45 bottom
U2  74HC589A_DT  [TSSOP16]  80,100 0 bottom
U3  74HC589A_DT  [TSSOP16]  223,100 0 bottom
U4  74HC589A_DT  [TSSOP16]  313,100 0 bottom
U5  IS31FL3743B  [UQFN40]  29,57 45 bottom
U6  IS31FL3743B  [UQFN40]  247.5,49.79 45 bottom
U7  TPS22995H-Q1  [SOT-23-THIN-6_DDC_TEX]  11,61 0 bottom
U8  TPS22995H-Q1  [SOT-23-THIN-6_DDC_TEX]  260.5,37.5 90 bottom
U$1  FIDUCIAL  [FIDUCIAL]  3,119 0 top
U$2  FIDUCIAL  [FIDUCIAL]  305,3 0 top
U$3  FIDUCIAL  [FIDUCIAL]  367,77 0 top
U$4  QMK_LOGO  [QMK_LOGO]  86.58,59.11 0 bottom
U$5  TECSMITH-LOGOLONG  [TECSMITH-NAME]  173.6,22.33 0 bottom
U$6  TECSMITH-LOGOLONG  [TECSMITH-NAME]  165,14 0 top
U$7  ??  [JLC_ORDER_NUMBER_QR_8X8]  360.2,9.8 0 bottom
UDB1  [MOLEX_781710004]  184.74,101 180 bottom
UDB2  [JST_SM04B-SRSS-TB_LF_SN]  342.8,102 90 bottom
Y1  32.768kHz ±20ppm 6pF  [CRYSTAL-SMD-3.2X1.5MM]  297,61 90 bottom
Y2  25MHz 9pF  [CRYSTAL_2.5X2]  289,48 180 bottom
Z1  156120M173000MILL  [156120M173000-MILL]  8.53,108.25 0 bottom
Z2  156120M173000MILL  [156120M173000-MILL]  32.34,108.25 0 bottom
Z3  156120M173000MILL  [156120M173000-MILL]  51.39,108.25 0 bottom
Z4  156120M173000MILL  [156120M173000-MILL]  70.44,108.25 0 bottom
Z5  156120M173000MILL  [156120M173000-MILL]  89.49,108.25 0 bottom
Z6  156120M173000MILL  [156120M173000-MILL]  113.3,108.25 0 bottom
Z7  156120M173000MILL  [156120M173000-MILL]  132.35,108.25 0 bottom
Z8  156120M173000MILL  [156120M173000-MILL]  151.4,108.25 0 bottom
Z9  156120M173000MILL  [156120M173000-MILL]  170.45,108.25 0 bottom
Z10  156120M173000MILL  [156120M173000-MILL]  194.26,108.25 0 bottom
Z11  156120M173000MILL  [156120M173000-MILL]  213.31,108.25 0 bottom
Z12  156120M173000MILL  [156120M173000-MILL]  232.36,108.25 0 bottom
Z13  156120M173000MILL  [156120M173000-MILL]  251.41,108.25 0 bottom
Z14  156120M173000MILL  [156120M173000-MILL]  275.23,108.25 0 bottom
Z15  156120M173000MILL  [156120M173000-MILL]  303.8,108.25 0 bottom
Z16  156120M173000MILL  [156120M173000-MILL]  322.85,108.25 0 bottom
Z17  156120M173000MILL  [156120M173000-MILL]  341.9,108.25 0 bottom
Z18  156120M173000MILL  [156120M173000-MILL]  360.95,108.25 0 bottom
Z19  DNP  [156120M173000-MILL]  8.53,84.44 0 bottom
Z20  156120M173000MILL  [156120M173000-MILL]  27.57,84.44 0 bottom
Z21  156120M173000MILL  [156120M173000-MILL]  46.62,84.44 0 bottom
Z22  156120M173000MILL  [156120M173000-MILL]  65.67,84.44 0 bottom
Z23  156120M173000MILL  [156120M173000-MILL]  84.72,84.44 0 bottom
Z24  156120M173000MILL  [156120M173000-MILL]  103.78,84.44 0 bottom
Z25  156120M173000MILL  [156120M173000-MILL]  122.83,84.44 0 bottom
Z26  156120M173000MILL  [156120M173000-MILL]  141.88,84.44 0 bottom
Z27  156120M173000MILL  [156120M173000-MILL]  160.93,84.44 0 bottom
Z28  156120M173000MILL  [156120M173000-MILL]  179.97,84.44 0 bottom
Z29  156120M173000MILL  [156120M173000-MILL]  199.03,84.44 0 bottom
Z30  156120M173000MILL  [156120M173000-MILL]  218.07,84.44 0 bottom
Z31  156120M173000MILL  [156120M173000-MILL]  237.12,84.44 0 bottom
Z32  156120M173000MILL  [156120M173000-MILL]  265.7,84.44 0 bottom
Z33  156120M173000MILL  [156120M173000-MILL]  303.8,84.44 0 bottom
Z34  156120M173000MILL  [156120M173000-MILL]  322.85,84.44 0 bottom
Z35  156120M173000MILL  [156120M173000-MILL]  341.9,84.44 0 bottom
Z36  156120M173000MILL  [156120M173000-MILL]  360.95,84.44 0 bottom
Z37  156120M173000MILL  [156120M173000-MILL]  13.29,65.39 0 bottom
Z38  156120M173000MILL  [156120M173000-MILL]  37.1,65.39 0 bottom
Z39  156120M173000MILL  [156120M173000-MILL]  56.15,65.39 0 bottom
Z40  156120M173000MILL  [156120M173000-MILL]  75.2,65.39 0 bottom
Z41  156120M173000MILL  [156120M173000-MILL]  94.25,65.39 0 bottom
Z42  156120M173000MILL  [156120M173000-MILL]  113.3,65.39 0 bottom
Z43  156120M173000MILL  [156120M173000-MILL]  132.35,65.39 0 bottom
Z44  156120M173000MILL  [156120M173000-MILL]  151.4,65.39 0 bottom
Z45  156120M173000MILL  [156120M173000-MILL]  170.45,65.39 0 bottom
Z46  156120M173000MILL  [156120M173000-MILL]  189.5,65.39 0 bottom
Z47  156120M173000MILL  [156120M173000-MILL]  208.55,65.39 0 bottom
Z48  156120M173000MILL  [156120M173000-MILL]  227.6,65.39 0 bottom
Z49  156120M173000MILL  [156120M173000-MILL]  246.65,65.39 0 bottom
Z50  156120M173000MILL  [156120M173000-MILL]  270.46,65.39 0 bottom
Z51  156120M173000MILL  [156120M173000-MILL]  303.8,65.39 0 bottom
Z52  156120M173000MILL  [156120M173000-MILL]  322.85,65.39 0 bottom
Z53  156120M173000MILL  [156120M173000-MILL]  341.9,65.39 0 bottom
Z54  156120M173000MILL  [156120M173000-MILL]  355.87,60.91 90 bottom
Z55  156120M173000MILL  [156120M173000-MILL]  15.67,46.34 0 bottom
Z56  156120M173000MILL  [156120M173000-MILL]  41.86,46.34 0 bottom
Z57  156120M173000MILL  [156120M173000-MILL]  60.91,46.34 0 bottom
Z58  156120M173000MILL  [156120M173000-MILL]  79.96,46.34 0 bottom
Z59  156120M173000MILL  [156120M173000-MILL]  99.01,46.34 0 bottom
Z60  156120M173000MILL  [156120M173000-MILL]  118.06,46.34 0 bottom
Z61  156120M173000MILL  [156120M173000-MILL]  137.11,46.34 0 bottom
Z62  156120M173000MILL  [156120M173000-MILL]  156.16,46.34 0 bottom
Z63  156120M173000MILL  [156120M173000-MILL]  175.21,46.34 0 bottom
Z64  156120M173000MILL  [156120M173000-MILL]  194.26,46.34 0 bottom
Z65  156120M173000MILL  [156120M173000-MILL]  213.31,46.34 0 bottom
Z66  156120M173000MILL  [156120M173000-MILL]  232.36,46.34 0 bottom
Z67  156120M173000MILL  [156120M173000-MILL]  263.32,46.34 0 bottom
Z68  156120M173000MILL  [156120M173000-MILL]  303.8,46.34 0 bottom
Z69  156120M173000MILL  [156120M173000-MILL]  322.85,46.34 0 bottom
Z70  156120M173000MILL  [156120M173000-MILL]  341.9,46.34 0 bottom
Z71  156120M173000MILL  [156120M173000-MILL]  20.43,27.29 0 bottom
Z72  156120M173000MILL  [156120M173000-MILL]  51.39,27.29 0 bottom
Z73  156120M173000MILL  [156120M173000-MILL]  70.44,27.29 0 bottom
Z74  156120M173000MILL  [156120M173000-MILL]  89.49,27.29 0 bottom
Z75  156120M173000MILL  [156120M173000-MILL]  108.54,27.29 0 bottom
Z76  156120M173000MILL  [156120M173000-MILL]  127.59,27.29 0 bottom
Z77  156120M173000MILL  [156120M173000-MILL]  146.64,27.29 0 bottom
Z78  156120M173000MILL  [156120M173000-MILL]  165.69,27.29 0 bottom
Z79  156120M173000MILL  [156120M173000-MILL]  184.74,27.29 0 bottom
Z80  156120M173000MILL  [156120M173000-MILL]  203.79,27.29 0 bottom
Z81  156120M173000MILL  [156120M173000-MILL]  222.84,27.29 0 bottom
Z82  156120M173000MILL  [156120M173000-MILL]  249.03,27.29 0 bottom
Z83  156120M173000MILL  [156120M173000-MILL]  279.99,22.52 0 bottom
Z84  156120M173000MILL  [156120M173000-MILL]  303.8,27.29 0 bottom
Z85  156120M173000MILL  [156120M173000-MILL]  322.85,27.29 0 bottom
Z86  156120M173000MILL  [156120M173000-MILL]  341.9,27.29 0 bottom
Z87  156120M173000MILL  [156120M173000-MILL]  355.87,22.81 90 bottom
Z88  156120M173000MILL  [156120M173000-MILL]  10.91,8.24 0 bottom
Z89  156120M173000MILL  [156120M173000-MILL]  34.72,8.24 0 bottom
Z90  156120M173000MILL  [156120M173000-MILL]  58.53,8.24 0 bottom
Z91  156120M173000MILL  [156120M173000-MILL]  129.97,8.24 0 bottom
Z92  156120M173000MILL  [156120M173000-MILL]  199.03,8.24 0 bottom
Z93  156120M173000MILL  [156120M173000-MILL]  218.07,8.24 0 bottom
Z94  156120M173000MILL  [156120M173000-MILL]  237.12,8.24 330 bottom
Z95  156120M173000MILL  [156120M173000-MILL]  260.94,3.47 0 bottom
Z96  156120M173000MILL  [156120M173000-MILL]  279.99,3.47 0 bottom
Z97  156120M173000MILL  [156120M173000-MILL]  299.04,3.47 0 bottom
Z98  156120M173000MILL  [156120M173000-MILL]  322.85,8.24 0 bottom
Z99  156120M173000MILL  [156120M173000-MILL]  341.9,8.24 0 bottom
Z101  156120M173000MILL  [156120M173000-MILL]  289.51,97.66 0 bottom
Z102  156120M173000MILL  [156120M173000-MILL]  289.51,86.81 30 bottom
Z103  156120M173000MILL  [156120M173000-MILL]  289.51,76.29 0 bottom
Z104  156120M173000MILL  [156120M173000-MILL]  91.87,8.24 0 bottom
Z105  156120M173000MILL  [156120M173000-MILL]  110.92,8.24 330 bottom
Z106  156120M173000MILL  [156120M173000-MILL]  149.02,8.24 0 bottom
Z107  156120M173000MILL  [156120M173000-MILL]  168.07,8.24 0 bottom

## Library data of the parts
5V JPWM JSPI JSPI@2 RST = SparkFun-Connectors
C1-C19 C29-C36 = rcl; SPICEPREFIX: C
C20 C23 = SparkFun-Capacitors; PROD_ID: CAP-07822
C21 C22 C25-C28 = SparkFun-Capacitors; PROD_ID: CAP-08604
C24 = SparkFun-Capacitors; PROD_ID: CAP-07886
D00 D1-D100 = jlcpcb_basic_parts
D107 G1-G6 H1-H12 = untitled
EEPROM = __tecsmith_kb_mcu
H_BSP H_ENT H_LS H_NEN H_NP H_SPC R0 R1-R15 SW_0 SW_1-SW_9 SW_A SW_B SW_BSP SW_C SW_CB SW_CL SW_CM SW_CS SW_D SW_DN SW_DP SW_DSH SW_DT SW_E SW_ENT SW_EP SW_ESC SW_F SW_F1-SW_F17 SW_FS SW_G SW_H SW_I SW_J SW_K SW_L SW_LA SW_LC SW_LF SW_LS SW_LW SW_M SW_MIN SW_MU SW_MUL SW_N SW_N0 SW_N1-SW_N9 SW_ND SW_NEN SW_NP SW_NUM SW_O SW_OB SW_P SW_Q SW_QU SW_R SW_RA SW_RC SW_RS SW_RT SW_RW SW_S SW_SPC SW_T SW_TAB SW_TDL SW_U SW_UP SW_V SW_W SW_X SW_Y SW_Z UDB1 UDB2 Z1-Z99 Z101-Z107 = ts_keyboards
JDIP = molex-pico-ezmate
JI2C = SparkFun-Connectors; PROD_ID: CONN-09696
JTAG Q6 = ts_custom_nick_nacks
L1 = rcl; SPICEPREFIX: L
LM1117 = SparkFun-IC-Power; PROD_ID: VREG-08170
LOGO1 U$4-U$6 = random_logos
M_M2 = __temp_to_delete; COPYRIGHT: Copyright (C) 2024 Ultra Librarian. All rights reserved.; MANUFACTURER_PART_NUMBER: SM05B-SRSS-TB(LF)(SN); MFR_NAME: JST; TYPE: Headers, Male Pins
Q1-Q3 Q7 = ts_custom_nick_nacks; PROD_ID: TRANS-00830
Q4 Q5 U2-U4 = __untitled
R16-R32 R33@1 R33@2 R34 R37-R42 R45 R46 R65 R66 R70-R72 = rcl; SPICEPREFIX: R
S1 = SparkFun-Switches; PROD_ID: SWCH-14139
TP-3V3 TP-5V TP-GND TP-LED-EN TP-USB+ TP-USB- TP-V-LED-1 TP-V-LED-2 = tecsmith_keyboards
U1 = st
U5 U6 = ts_kb_mcu
U7 U8 = __untitled; COPYRIGHT: Copyright (C) 2023 Ultra Librarian. All rights reserved.; MANUFACTURER_PART_NUMBER: TPS22995HQDDCRQ1; MFR_NAME: Texas Instruments; TYPE: Power Management
U$1-U$3 Y2 = __temp_to_delete
U$7 = tecsmith_jlcpcb_ordering
Y1 = SparkFun-Clocks; PROD_ID: XTAL-13062

## Nets
!BOOT: Q6.1 R28.2 RST.2 S1.3 S1.4
!RESET: C30.2 R25.2 U1.7
AUX_CS: JPWM.4 JSPI.5 U1.19
AUX_DC: JPWM.3 JSPI@2.1 U1.11
BLU1: R6.8 Z1.2 Z2.2 Z3.2 Z4.2 Z5.2 Z6.2 Z7.2 Z8.2 Z9.2
BLU2: R6.6 Z19.2 Z20.2 Z21.2 Z22.2 Z23.2 Z24.2 Z25.2 Z26.2 Z27.2 Z28.2
BLU3: R7.6 Z37.2 Z38.2 Z39.2 Z40.2 Z41.2 Z42.2 Z43.2 Z44.2 Z45.2
BLU4: R7.8 Z55.2 Z56.2 Z57.2 Z58.2 Z59.2 Z60.2 Z61.2 Z62.2 Z63.2
BLU5: R8.8 Z71.2 Z72.2 Z73.2 Z74.2 Z75.2 Z76.2 Z77.2 Z78.2
BLU6: R8.6 Z88.2 Z89.2 Z90.2 Z91.2 Z104.2 Z105.2 Z106.2 Z107.2
BLU7: R9.8 Z10.2 Z11.2 Z12.2 Z13.2 Z14.2 Z15.2 Z16.2 Z17.2 Z18.2
BLU8: R9.6 Z29.2 Z30.2 Z31.2 Z32.2 Z33.2 Z34.2 Z35.2 Z36.2 Z101.2 Z102.2
BLU9: R10.8 Z46.2 Z47.2 Z48.2 Z49.2 Z50.2 Z51.2 Z52.2 Z53.2 Z54.2 Z103.2
BLU10: R10.6 Z64.2 Z65.2 Z66.2 Z67.2 Z68.2 Z69.2 Z70.2
BLU11: R11.8 Z79.2 Z80.2 Z81.2 Z82.2 Z83.2 Z84.2 Z85.2 Z86.2 Z87.2
BLU12: R11.6 Z92.2 Z93.2 Z94.2 Z95.2 Z96.2 Z97.2 Z98.2 Z99.2
BOOT: D100.A Q6.3 R26.2 R29.2
BOOT0: C29.1 R20.1 R21.2 R22.2 U1.44
BOOT1: R66.2 U1.20
COL0: D1.C D19.C D37.C D55.C D71.C D88.C R4.7 U2.1
COL1: D2.C D20.C D38.C D56.C D89.C R4.6 U2.2
COL2: D3.C D21.C D39.C D57.C D72.C D90.C R4.5 U2.3
COL3: D4.C D22.C D40.C D58.C D73.C JDIP.3 R5.8 U2.4
COL4: D5.C D23.C D41.C D59.C D74.C JDIP.4 R5.7 U2.5
COL5: D6.C D24.C D42.C D60.C D75.C D91.C R5.6 U2.6
COL6: D7.C D25.C D43.C D61.C D76.C JDIP.5 R5.5 U2.7
COL7: D8.C D26.C D44.C D62.C D77.C JDIP.6 R2.7 U3.1
COL8: D9.C D27.C D45.C D63.C D78.C D92.C R2.6 U3.2
COL9: D10.C D28.C D46.C D64.C D79.C D93.C R2.5 U3.3
COL10: D11.C D29.C D47.C D65.C D80.C D94.C R3.8 U3.4
COL11: D12.C D30.C D48.C D66.C D81.C D95.C R3.7 U3.5
COL12: D13.C D31.C D49.C D82.C D96.C R3.6 U3.6
COL13: D14.C D32.C D50.C D67.C D83.C D97.C R3.5 U3.7
COL14: D15.C D33.C D51.C D68.C D84.C R1.7 U4.1
COL15: D16.C D34.C D52.C D69.C D85.C D98.C R1.6 U4.2
COL16: D17.C D35.C D53.C D70.C D86.C D99.C R1.5 U4.3
COL17: D18.C D36.C D54.C D87.C R0.8 U4.4
D91_A: D91.A Q7.2 R34.2
EE_CS: EEPROM.1 U1.18
ENC_A: C35.1 R16.1 SW_F13.A U1.12
ENC_B: C36.1 R17.1 SW_F13.B U1.13
ENC_C: C31.1 R30.1 SW_F17.A U1.29
ENC_D: C32.1 R31.1 SW_F17.B U1.41
G1: R4.8 U2.15
G2: R2.8 U3.15
G3: R1.8 U4.15
G4: R0.7 U4.5
G5: R0.6 U4.6
G6: R0.5 U4.7
GND: 5V.2 C1.1 C2.1 C3.1 C4.1 C5.1 C6.1 C7.1 C8.1 C9.1 C10.1 C11.2 C12.2 C13.2 C14.2 C15.2 C16.2 C17.2 C18.2 C19.2 C20.2 C21.2 C22.2 C23.2 C24.2 C25.2 C26.2 C27.2 C28.2 C29.2 C30.1 C31.2 C32.2 C33.1 C34.1 C35.2 C36.2 EEPROM.4 JDIP.1 JI2C.4 JPWM.5 JSPI.6 JTAG.3 JTAG.5 JTAG.9 LM1117.1 M_M2.1 M_M2.2 M_M2.6 M_M2.7 Q1.2 Q2.2 Q3.2 R0.1 R0.2 R0.3 R0.4 R1.1 R1.2 R1.3 R1.4 R2.1 R2.2 R2.3 R2.4 R3.1 R3.2 R3.3 R3.4 R4.1 R4.2 R4.3 R4.4 R5.1 R5.2 R5.3 R5.4 R12.4 R12.5 R13.1 R13.8 R14.4 R14.5 R15.1 R15.8 R21.1 R24.2 R27.2 R29.1 R32.2 R37.1 R38.1 R39.1 R40.1 R66.1 R71.1 R72.1 RST.1 S1.1 S1.2 SW_F13.C SW_F17.C TP-GND.1 U1.1 U1.8 U1.23 U1.35 U1.47 U1.49 U1.49@1 U1.49@2 U1.49@3 U1.49@4 U1.49@5 U1.49@6 U1.49@7 U1.49@8 U1.49@9 U1.49@10 U1.49@11 U1.49@12 U1.49@13 U1.49@14 U1.49@15 U1.49@16 U1.49@17 U1.49@18 U2.8 U2.14 U3.8 U4.8 U5.16 U5.23 U5.EPAD U5.EPAD@1 U5.EPAD@2 U6.16 U6.23 U6.EPAD U6.EPAD@1 U6.EPAD@2 U7.4 U8.4 UDB1.4 UDB1.NC1 UDB1.NC2 UDB2.4 UDB2.NC1 UDB2.NC2 Y2.2 Y2.4
GRN1: R6.7 Z1.4 Z2.4 Z3.4 Z4.4 Z5.4 Z6.4 Z7.4 Z8.4 Z9.4
GRN2: R6.5 Z19.4 Z20.4 Z21.4 Z22.4 Z23.4 Z24.4 Z25.4 Z26.4 Z27.4 Z28.4
GRN3: R7.5 Z37.4 Z38.4 Z39.4 Z40.4 Z41.4 Z42.4 Z43.4 Z44.4 Z45.4
GRN4: R7.7 Z55.4 Z56.4 Z57.4 Z58.4 Z59.4 Z60.4 Z61.4 Z62.4 Z63.4
GRN5: R8.7 Z71.4 Z72.4 Z73.4 Z74.4 Z75.4 Z76.4 Z77.4 Z78.4
GRN6: R8.5 Z88.4 Z89.4 Z90.4 Z91.4 Z104.4 Z105.4 Z106.4 Z107.4
GRN7: R9.7 Z10.4 Z11.4 Z12.4 Z13.4 Z14.4 Z15.4 Z16.4 Z17.4 Z18.4
GRN8: R9.5 Z29.4 Z30.4 Z31.4 Z32.4 Z33.4 Z34.4 Z35.4 Z36.4 Z101.4 Z102.4
GRN9: R10.7 Z46.4 Z47.4 Z48.4 Z49.4 Z50.4 Z51.4 Z52.4 Z53.4 Z54.4 Z103.4
GRN10: R10.5 Z64.4 Z65.4 Z66.4 Z67.4 Z68.4 Z69.4 Z70.4
GRN11: R11.7 Z79.4 Z80.4 Z81.4 Z82.4 Z83.4 Z84.4 Z85.4 Z86.4 Z87.4
GRN12: R11.5 Z92.4 Z93.4 Z94.4 Z95.4 Z96.4 Z97.4 Z98.4 Z99.4
J_RST: JTAG.10 U1.40
J_TCK: JTAG.2 U1.37
J_TDI: JTAG.8 U1.38
J_TDO: JTAG.6 U1.39
J_TMS: JTAG.4 U1.34
K_BSP: D32.A SW_BSP.1@1 SW_BSP.1@2
K_CL1: D55.A SW_CL.1@1 SW_CL.1@2
K_DP: D50.A SW_DP.1@1 SW_DP.1@2
K_ENT: D67.A SW_ENT.1@1 SW_ENT.1@2
K_LS: D71.A SW_LS.1@1 SW_LS.1@2
LATCH: Q1.3 R65.1 U2.12 U2.13 U3.12 U3.13 U4.12 U4.13
LED: D107.C U1.2
LED1: U5.11 Z1.1 Z19.1 Z37.1 Z55.1 Z71.1 Z88.1
LED1_CS: U1.30 U5.25
LED2: U5.10 Z20.1 Z89.1
LED2_CS: U1.31 U6.25
LED3: U5.9 Z2.1 Z21.1 Z38.1 Z56.1 Z72.1 Z90.1
LED4: U5.8 Z3.1 Z22.1 Z39.1 Z57.1 Z73.1 Z104.1
LED5: U5.7 Z4.1 Z23.1 Z40.1 Z58.1 Z74.1 Z105.1
LED6: U5.6 Z5.1 Z24.1 Z41.1 Z59.1 Z75.1 Z91.1
LED7: U5.4 Z6.1 Z25.1 Z42.1 Z60.1 Z76.1 Z106.1
LED8: U5.3 Z7.1 Z26.1 Z43.1 Z61.1 Z77.1 Z107.1
LED9: U5.2 Z8.1 Z27.1 Z44.1 Z62.1 Z78.1
LED10: U5.1 Z9.1 Z28.1 Z45.1 Z63.1
LED11: U6.11 Z10.1 Z29.1 Z46.1 Z64.1 Z79.1 Z92.1
LED12: U6.10 Z11.1 Z30.1 Z47.1 Z65.1 Z80.1 Z93.1
LED13: U6.9 Z12.1 Z31.1 Z48.1 Z66.1 Z81.1 Z94.1
LED14: U6.8 Z13.1 Z32.1 Z49.1 Z67.1 Z95.1
LED15: U6.7 Z50.1 Z82.1 Z96.1 Z101.1
LED16: U6.6 Z14.1 Z83.1 Z97.1 Z102.1 Z103.1
LED17: U6.4 Z15.1 Z33.1 Z51.1 Z68.1 Z84.1
LED18: U6.3 Z16.1 Z34.1 Z52.1 Z69.1 Z85.1 Z98.1
LED19: U6.2 Z17.1 Z35.1 Z53.1 Z70.1 Z86.1 Z99.1
LED20: U6.1 Z18.1 Z36.1 Z54.1 Z87.1
LED_PWR_EN: C5.2 C10.2 R37.2 R39.2 TP-LED-EN.1 U1.21 U5.26 U6.26 U7.3 U8.3
MATRIX_CS: Q1.1 U1.14 U2.10 U3.10 U4.10
MISO: EEPROM.2 JSPI.1 U1.16 U4.9 U5.24 U6.24
MOSI: EEPROM.5 JSPI.4 U1.17 U5.28 U6.28
N$1: R72.2 U8.6
N$2: D70.A SW_N6.1@1 SW_N6.1@2
N$3: R33@1.2 R33@2.1 SW_SPC.2@1 SW_SPC.2@2
N$5: D100.C R20.2
N$6: Q5.1 R19.1 SW_F17.S
N$7: Q3.3 R22.1
N$8: Q4.1 R18.1 SW_F13.S
N$9: Q3.1 R23.1 R24.1
N$11: Q2.3 R23.2 R25.1
N$12: Q2.1 R26.1 R27.1
N$25: D1.A SW_ESC.1@1 SW_ESC.1@2
N$26: D2.A SW_F1.1@1 SW_F1.1@2
N$27: D3.A SW_F2.1@1 SW_F2.1@2
N$28: D4.A SW_F3.1@1 SW_F3.1@2
N$29: D5.A SW_F4.1@1 SW_F4.1@2
N$30: D6.A SW_F5.1@1 SW_F5.1@2
N$31: D7.A SW_F6.1@1 SW_F6.1@2
N$32: D8.A SW_F7.1@1 SW_F7.1@2
N$33: D9.A SW_F8.1@1 SW_F8.1@2
N$34: D10.A SW_F9.1@1 SW_F9.1@2
N$35: D11.A SW_F10.1@1 SW_F10.1@2
N$36: D12.A SW_F11.1@1 SW_F11.1@2
N$37: D13.A SW_F12.1@1 SW_F12.1@2
N$39: D15.A SW_F14.1@1 SW_F14.1@2
N$40: D16.A SW_F15.1@1 SW_F15.1@2
N$41: D19.A SW_TDL.1@1 SW_TDL.1@2
N$42: D20.A SW_1.1@1 SW_1.1@2
N$43: D21.A SW_2.1@1 SW_2.1@2
N$44: D22.A SW_3.1@1 SW_3.1@2
N$45: D23.A SW_4.1@1 SW_4.1@2
N$46: D24.A SW_5.1@1 SW_5.1@2
N$47: D25.A SW_6.1@1 SW_6.1@2
N$48: D26.A SW_7.1@1 SW_7.1@2
N$49: D27.A SW_8.1@1 SW_8.1@2
N$50: D28.A SW_9.1@1 SW_9.1@2
N$51: D29.A SW_0.1@1 SW_0.1@2
N$52: D30.A SW_MU.1@1 SW_MU.1@2
N$53: D31.A SW_EP.1@1 SW_EP.1@2
N$55: D33.A SW_NUM.1@1 SW_NUM.1@2
N$56: D34.A SW_DSH.1@1 SW_DSH.1@2
N$57: D38.A SW_Q.1@1 SW_Q.1@2
N$58: D37.A SW_TAB.1@1 SW_TAB.1@2
N$59: D39.A SW_W.1@1 SW_W.1@2
N$60: D40.A SW_E.1@1 SW_E.1@2
N$61: D41.A SW_R.1@1 SW_R.1@2
N$62: D42.A SW_T.1@1 SW_T.1@2
N$63: D43.A SW_Y.1@1 SW_Y.1@2
N$64: D44.A SW_U.1@1 SW_U.1@2
N$65: D45.A SW_I.1@1 SW_I.1@2
N$66: D46.A SW_O.1@1 SW_O.1@2
N$67: D47.A SW_P.1@1 SW_P.1@2
N$68: D48.A SW_OB.1@1 SW_OB.1@2
N$69: D49.A SW_CB.1@1 SW_CB.1@2
N$71: D51.A SW_N7.1@1 SW_N7.1@2
N$72: D52.A SW_N8.1@1 SW_N8.1@2
N$73: D69.A SW_N5.1@1 SW_N5.1@2
N$74: D68.A SW_N4.1@1 SW_N4.1@2
N$75: C11.1 U1.22
N$76: D66.A SW_QU.1@1 SW_QU.1@2
N$77: D65.A SW_CS.1@1 SW_CS.1@2
N$78: D64.A SW_L.1@1 SW_L.1@2
N$80: D56.A SW_A.1@1 SW_A.1@2
N$81: D57.A SW_S.1@1 SW_S.1@2
N$82: D58.A SW_D.1@1 SW_D.1@2
N$83: D59.A SW_F.1@1 SW_F.1@2
N$84: D60.A SW_G.1@1 SW_G.1@2
N$85: D61.A SW_H.1@1 SW_H.1@2
N$86: D62.A SW_J.1@1 SW_J.1@2
N$87: D63.A SW_K.1@1 SW_K.1@2
N$88: D72.A SW_Z.1@1 SW_Z.1@2
N$89: D73.A SW_X.1@1 SW_X.1@2
N$90: D74.A SW_C.1@1 SW_C.1@2
N$91: D75.A SW_V.1@1 SW_V.1@2
N$92: D76.A SW_B.1@1 SW_B.1@2
N$93: D77.A SW_N.1@1 SW_N.1@2
N$94: D78.A SW_M.1@1 SW_M.1@2
N$95: D79.A SW_CM.1@1 SW_CM.1@2
N$96: D80.A SW_DT.1@1 SW_DT.1@2
N$97: D81.A SW_FS.1@1 SW_FS.1@2
N$98: D82.A SW_RS.1@1 SW_RS.1@2
N$99: D83.A SW_UP.1@1 SW_UP.1@2
N$100: D84.A SW_N1.1@1 SW_N1.1@2
N$101: D85.A SW_N2.1@1 SW_N2.1@2
N$102: D98.A SW_N0.1@1 SW_N0.1@2
N$103: D97.A SW_RT.1@1 SW_RT.1@2
N$104: D96.A SW_DN.1@1 SW_DN.1@2
N$105: D95.A SW_LF.1@1 SW_LF.1@2
N$107: D94.A SW_RC.1@1 SW_RC.1@2
N$108: D93.A SW_RW.1@1 SW_RW.1@2
N$109: D92.A SW_RA.1@1 SW_RA.1@2
N$111: D90.A SW_LA.1@1 SW_LA.1@2
N$112: D89.A SW_LW.1@1 SW_LW.1@2
N$113: D88.A SW_LC.1@1 SW_LC.1@2
N$114: D99.A SW_ND.1@1 SW_ND.1@2
N$115: D86.A SW_N3.1@1 SW_N3.1@2
N$116: D87.A SW_NEN.2@1 SW_NEN.2@2
N$117: D54.A SW_NP.2@1 SW_NP.2@2
N$118: D53.A SW_N9.1@1 SW_N9.1@2
N$119: D36.A SW_MIN.1@1 SW_MIN.1@2
N$120: D35.A SW_MUL.1@1 SW_MUL.1@2
N$121: D17.A SW_F16.1@1 SW_F16.1@2
N$135: R71.2 U7.6
N$136: R38.2 U5.29
N$145: D107.A R70.2
N$151: R40.2 U6.29
RED1: R12.8 Z1.3 Z2.3 Z3.3 Z4.3 Z5.3 Z6.3 Z7.3 Z8.3 Z9.3
RED2: R12.7 Z19.3 Z20.3 Z21.3 Z22.3 Z23.3 Z24.3 Z25.3 Z26.3 Z27.3 Z28.3
RED3: R12.6 Z37.3 Z38.3 Z39.3 Z40.3 Z41.3 Z42.3 Z43.3 Z44.3 Z45.3
RED4: R13.7 Z55.3 Z56.3 Z57.3 Z58.3 Z59.3 Z60.3 Z61.3 Z62.3 Z63.3
RED5: R13.6 Z71.3 Z72.3 Z73.3 Z74.3 Z75.3 Z76.3 Z77.3 Z78.3
RED6: R13.5 Z88.3 Z89.3 Z90.3 Z91.3 Z104.3 Z105.3 Z106.3 Z107.3
RED7: R14.8 Z10.3 Z11.3 Z12.3 Z13.3 Z14.3 Z15.3 Z16.3 Z17.3 Z18.3
RED8: R14.7 Z29.3 Z30.3 Z31.3 Z32.3 Z33.3 Z34.3 Z35.3 Z36.3 Z101.3 Z102.3
RED9: R14.6 Z46.3 Z47.3 Z48.3 Z49.3 Z50.3 Z51.3 Z52.3 Z53.3 Z54.3 Z103.3
RED10: R15.5 Z64.3 Z65.3 Z66.3 Z67.3 Z68.3 Z69.3 Z70.3
RED11: R15.7 Z79.3 Z80.3 Z81.3 Z82.3 Z83.3 Z84.3 Z85.3 Z86.3 Z87.3
RED12: R15.6 Z92.3 Z93.3 Z94.3 Z95.3 Z96.3 Z97.3 Z98.3 Z99.3
ROW0: Q4.2 Q5.2 SW_ESC.2@1 SW_ESC.2@2 SW_F1.2@1 SW_F1.2@2 SW_F2.2@1 SW_F2.2@2 SW_F3.2@1 SW_F3.2@2 SW_F4.2@1 SW_F4.2@2 SW_F5.2@1 SW_F5.2@2 SW_F6.2@1 SW_F6.2@2 SW_F7.2@1 SW_F7.2@2 SW_F8.2@1 SW_F8.2@2 SW_F9.2@1 SW_F9.2@2 SW_F10.2@1 SW_F10.2@2 SW_F11.2@1 SW_F11.2@2 SW_F12.2@1 SW_F12.2@2 SW_F13.2@1 SW_F13.2@2 SW_F14.2@1 SW_F14.2@2 SW_F15.2@1 SW_F15.2@2 SW_F16.2@1 SW_F16.2@2 SW_F17.2@1 SW_F17.2@2 U1.25
ROW1: SW_0.2@1 SW_0.2@2 SW_1.2@1 SW_1.2@2 SW_2.2@1 SW_2.2@2 SW_3.2@1 SW_3.2@2 SW_4.2@1 SW_4.2@2 SW_5.2@1 SW_5.2@2 SW_6.2@1 SW_6.2@2 SW_7.2@1 SW_7.2@2 SW_8.2@1 SW_8.2@2 SW_9.2@1 SW_9.2@2 SW_BSP.2@1 SW_BSP.2@2 SW_DSH.2@1 SW_DSH.2@2 SW_EP.2@1 SW_EP.2@2 SW_MIN.2@1 SW_MIN.2@2 SW_MU.2@1 SW_MU.2@2 SW_MUL.2@1 SW_MUL.2@2 SW_NUM.2@1 SW_NUM.2@2 SW_TDL.2@1 SW_TDL.2@2 U1.26
ROW2: SW_CB.2@1 SW_CB.2@2 SW_DP.2@1 SW_DP.2@2 SW_E.2@1 SW_E.2@2 SW_I.2@1 SW_I.2@2 SW_N7.2@1 SW_N7.2@2 SW_N8.2@1 SW_N8.2@2 SW_N9.2@1 SW_N9.2@2 SW_NP.1@1 SW_NP.1@2 SW_O.2@1 SW_O.2@2 SW_OB.2@1 SW_OB.2@2 SW_P.2@1 SW_P.2@2 SW_Q.2@1 SW_Q.2@2 SW_R.2@1 SW_R.2@2 SW_T.2@1 SW_T.2@2 SW_TAB.2@1 SW_TAB.2@2 SW_U.2@1 SW_U.2@2 SW_W.2@1 SW_W.2@2 SW_Y.2@1 SW_Y.2@2 U1.27
ROW3: SW_A.2@1 SW_A.2@2 SW_CL.2@1 SW_CL.2@2 SW_CS.2@1 SW_CS.2@2 SW_D.2@1 SW_D.2@2 SW_ENT.2@1 SW_ENT.2@2 SW_F.2@1 SW_F.2@2 SW_G.2@1 SW_G.2@2 SW_H.2@1 SW_H.2@2 SW_J.2@1 SW_J.2@2 SW_K.2@1 SW_K.2@2 SW_L.2@1 SW_L.2@2 SW_N4.2@1 SW_N4.2@2 SW_N5.2@1 SW_N5.2@2 SW_N6.2@1 SW_N6.2@2 SW_QU.2@1 SW_QU.2@2 SW_S.2@1 SW_S.2@2 U1.28
ROW4: SW_B.2@1 SW_B.2@2 SW_C.2@1 SW_C.2@2 SW_CM.2@1 SW_CM.2@2 SW_DT.2@1 SW_DT.2@2 SW_FS.2@1 SW_FS.2@2 SW_LS.2@1 SW_LS.2@2 SW_M.2@1 SW_M.2@2 SW_N1.2@1 SW_N1.2@2 SW_N2.2@1 SW_N2.2@2 SW_N3.2@1 SW_N3.2@2 SW_N.2@1 SW_N.2@2 SW_NEN.1@1 SW_NEN.1@2 SW_RS.2@1 SW_RS.2@2 SW_UP.2@1 SW_UP.2@2 SW_V.2@1 SW_V.2@2 SW_X.2@1 SW_X.2@2 SW_Z.2@1 SW_Z.2@2 U1.45
ROW5: JDIP.2 Q7.3 R33@2.2 SW_DN.2@1 SW_DN.2@2 SW_LA.2@1 SW_LA.2@2 SW_LC.2@1 SW_LC.2@2 SW_LF.2@1 SW_LF.2@2 SW_LW.2@1 SW_LW.2@2 SW_N0.2@1 SW_N0.2@2 SW_ND.2@1 SW_ND.2@2 SW_RA.2@1 SW_RA.2@2 SW_RC.2@1 SW_RC.2@2 SW_RT.2@1 SW_RT.2@2 SW_RW.2@1 SW_RW.2@2 U1.46
S13: D14.A Q4.3 SW_F13.1@1 SW_F13.1@2
S17: D18.A Q5.3 SW_F17.1@1 SW_F17.1@2
SCK: EEPROM.6 JSPI.3 U1.15 U2.11 U3.11 U4.11 U5.27 U6.27
SCL: JI2C.1 R42.1 U1.42
SDA: JI2C.2 R41.1 U1.43
SYNC: U5.30 U6.30
U2_TO_U3: U2.9 U3.14
U3_TO_U4: U3.9 U4.14
USB_D_N: M_M2.3 R45.1 TP-USB-.1 UDB1.2 UDB2.2
USB_D_P: M_M2.4 R46.1 TP-USB+.1 UDB1.3 UDB2.3
USB_N: R45.2 U1.32
USB_P: R46.2 U1.33
VCC_1: 5V.1 C20.1 C21.1 C33.2 C34.2 D00.C LM1117.3 M_M2.5 TP-5V.1 U7.1 U7.2 U8.1 U8.2 UDB1.1 UDB2.1
VCC_2: C13.1 C14.1 C15.1 C22.1 C23.1 C24.1 C25.1 C26.1 C27.1 C28.1 D00.A EEPROM.3 EEPROM.7 EEPROM.8 JI2C.3 JPWM.1 JSPI.2 JTAG.1 L1.2 LM1117.2 LM1117.4 Q6.2 R16.2 R17.2 R18.2 R19.2 R28.1 R30.2 R31.2 R33@1.1 R41.2 R42.2 R65.2 R70.1 TP-3V3.1 U1.24 U1.36 U1.48 U2.16 U3.16 U4.16
VCC_LED_1: C1.2 C2.2 C3.2 C4.2 TP-V-LED-1.1 U5.5 U5.22 U7.5
VCC_LED_2: C6.2 C7.2 C8.2 C9.2 TP-V-LED-2.1 U6.5 U6.22 U8.5
VREF+: C12.1 L1.1 U1.9
WKUP: JPWM.2 Q7.1 R32.1 R34.1 SW_SPC.1@1 SW_SPC.1@2 U1.10
XB1: R6.1 U5.39
XB2: R6.3 U5.36
XB3: R7.3 U5.33
XB4: R7.1 U5.21
XB5: R8.1 U5.18
XB6: R8.3 U5.14
XB7: R9.1 U6.39
XB8: R9.3 U6.36
XB9: R10.1 U6.33
XB10: R10.3 U6.21
XB11: R11.1 U6.18
XB12: R11.3 U6.14
XG1: R6.2 U5.38
XG2: R6.4 U5.35
XG3: R7.4 U5.32
XG4: R7.2 U5.20
XG5: R8.2 U5.17
XG6: R8.4 U5.13
XG7: R9.2 U6.38
XG8: R9.4 U6.35
XG9: R10.2 U6.32
XG10: R10.4 U6.20
XG11: R11.2 U6.17
XG12: R11.4 U6.13
XR1: R12.1 U5.37
XR2: R12.2 U5.34
XR3: R12.3 U5.31
XR4: R13.2 U5.19
XR5: R13.3 U5.15
XR6: R13.4 U5.12
XR7: R14.1 U6.37
XR8: R14.2 U6.34
XR9: R14.3 U6.31
XR10: R15.4 U6.19
XR11: R15.2 U6.15
XR12: R15.3 U6.12
Y1I: C16.1 U1.3 Y1.P$2
Y1O: C17.1 U1.4 Y1.P$1
Y2I: C18.1 U1.5 Y2.3
Y2O: C19.1 U1.6 Y2.1

## Tracks (layer width: path | path; a pad name or v marks a point on that pad's centre or on a via)
!BOOT  (via drill 0.35)
  Top 0.254: S1.3 89.33,11.13 94.41,11.13 S1.4 94.68,11.4 v97.7,11.4 98.38,11.4 100.28,13.3 RST.2
  Bottom 0.254: Q6.1 99.35,13.8 97.75,13.8 R28.2 v97.7,11.4
!RESET  (via drill 0.35)
  Top 0.254: v291.85,56.42 291.6,56.42 291.26,56.08 288.73,56.08 288.25,55.6 284.02,55.6 282.48,57.15 280.71,57.15 280.48,56.92 v279.9,56.92 | v120,40.42 121.58,42 198.22,42 198.5,42.27 v199.1,42.27 | v92.47,19.12 93.67,19.12 93.92,18.88 112.95,18.88 113.33,19.25 v113.92,19.25 | v212.58,62.36 213.21,63 222.43,63 224.18,61.25 229.47,61.25 231.22,63 242.28,63 243.73,61.54 248.62,61.54 249.65,62.58 253.05,62.58 254.14,61.49 259.94,61.49 v260.25,61.8
  Bottom 0.254: U1.7 291.85,56.8 v291.85,56.42 | v120,40.42 120,40.23 116.58,36.8 116.58,21.5 114.7,19.63 114.3,19.63 v113.92,19.25 | v279.9,56.92 278.67,56.92 277.38,55.63 273.45,55.63 272.24,56.83 272.24,58.04 271.16,59.12 268.36,59.12 267.69,59.8 267.69,60.85 266.75,61.79 263.31,61.79 262.25,60.73 261.33,60.73 v260.25,61.8 | R25.2 90.17,18.5 C30.2 91.88,18.52 v92.47,19.12 | v199.1,42.27 199.78,42.27 202.5,45 202.5,55.2 208.49,61.19 211.4,61.19 v212.58,62.36
AUX_CS  (via drill 0.35)
  Top 0.254: v282.57,53.17 282.57,52 282.83,51.75 283.61,50.97 283.61,47.08 280.99,44.46 v280.99,44.1 | JSPI.5 301.06,19.95 301.75,19.95 302.26,20.46 303.12,20.46 303.8,21.13 306.07,21.13 307.43,19.77 308.83,19.77 v308.88,19.72
  Bottom 0.254: U1.19 283.4,56.75 283.4,55.33 282.57,54.5 v282.57,53.17 | JSPI.5 300.29,18.18 299.66,17.55 294.18,17.55 291.64,20.09 291.64,23.66 291.5,23.8 291.5,35.2 288.6,38.1 284.84,38.1 281.87,41.08 281.87,41.29 280.51,42.64 280.51,43.62 v280.99,44.1 | JPWM.4 309.69,10.69 309.69,12.53 309.2,13.02 309.2,19.41 v308.88,19.72
AUX_DC  (via drill 0.35)
  Top 0.254: v288.95,53.05 289.75,53.05 292.48,50.32 292.48,46.82 294.56,44.73 297.48,44.73 299,43.21 299.84,43.21 301.17,41.88 305,41.88 305.8,41.08 308.13,41.08 308.63,41.59 309.71,41.59 311.9,39.4 311.9,26.71 311.39,26.2 311.39,25.04 v311.8,24.62 | JSPI@2.1 302.85,19.48 304,20.64 305.86,20.64 307.44,19.05 308.14,19.05 v308.19,19
  Bottom 0.254: U1.11 289.45,56.37 289.45,54.65 288.95,54.15 v288.95,53.05 | JPWM.3 309.69,13.23 309.69,17.64 310.11,18.05 310.11,18.99 311.21,20.1 v311.21,20.61 | v311.8,24.62 311.8,24.1 312.06,23.84 312.06,21.93 311.21,21.09 v311.21,20.61 | v308.19,19 v308.19,19.01 308.14,19.06 308.14,20.03 308.57,20.47 310.54,20.47 310.68,20.61 v311.21,20.61
BLU1  (via drill 0.35)